# Altium PCB SD171-6.0PCB4.PcbDoc (part 6 of 11)
Units mil, origin at the board's own origin, x right, y up, seen from the top; angles counter-clockwise.
Board outline 5995 x 3921.26 mil, 6 copper layers (Top Layer, GND, Mid-Layer 1, Mid-Layer 2, VCC, Bottom Layer); 477 components, 539 nets, 2143 pads, 1050 vias.
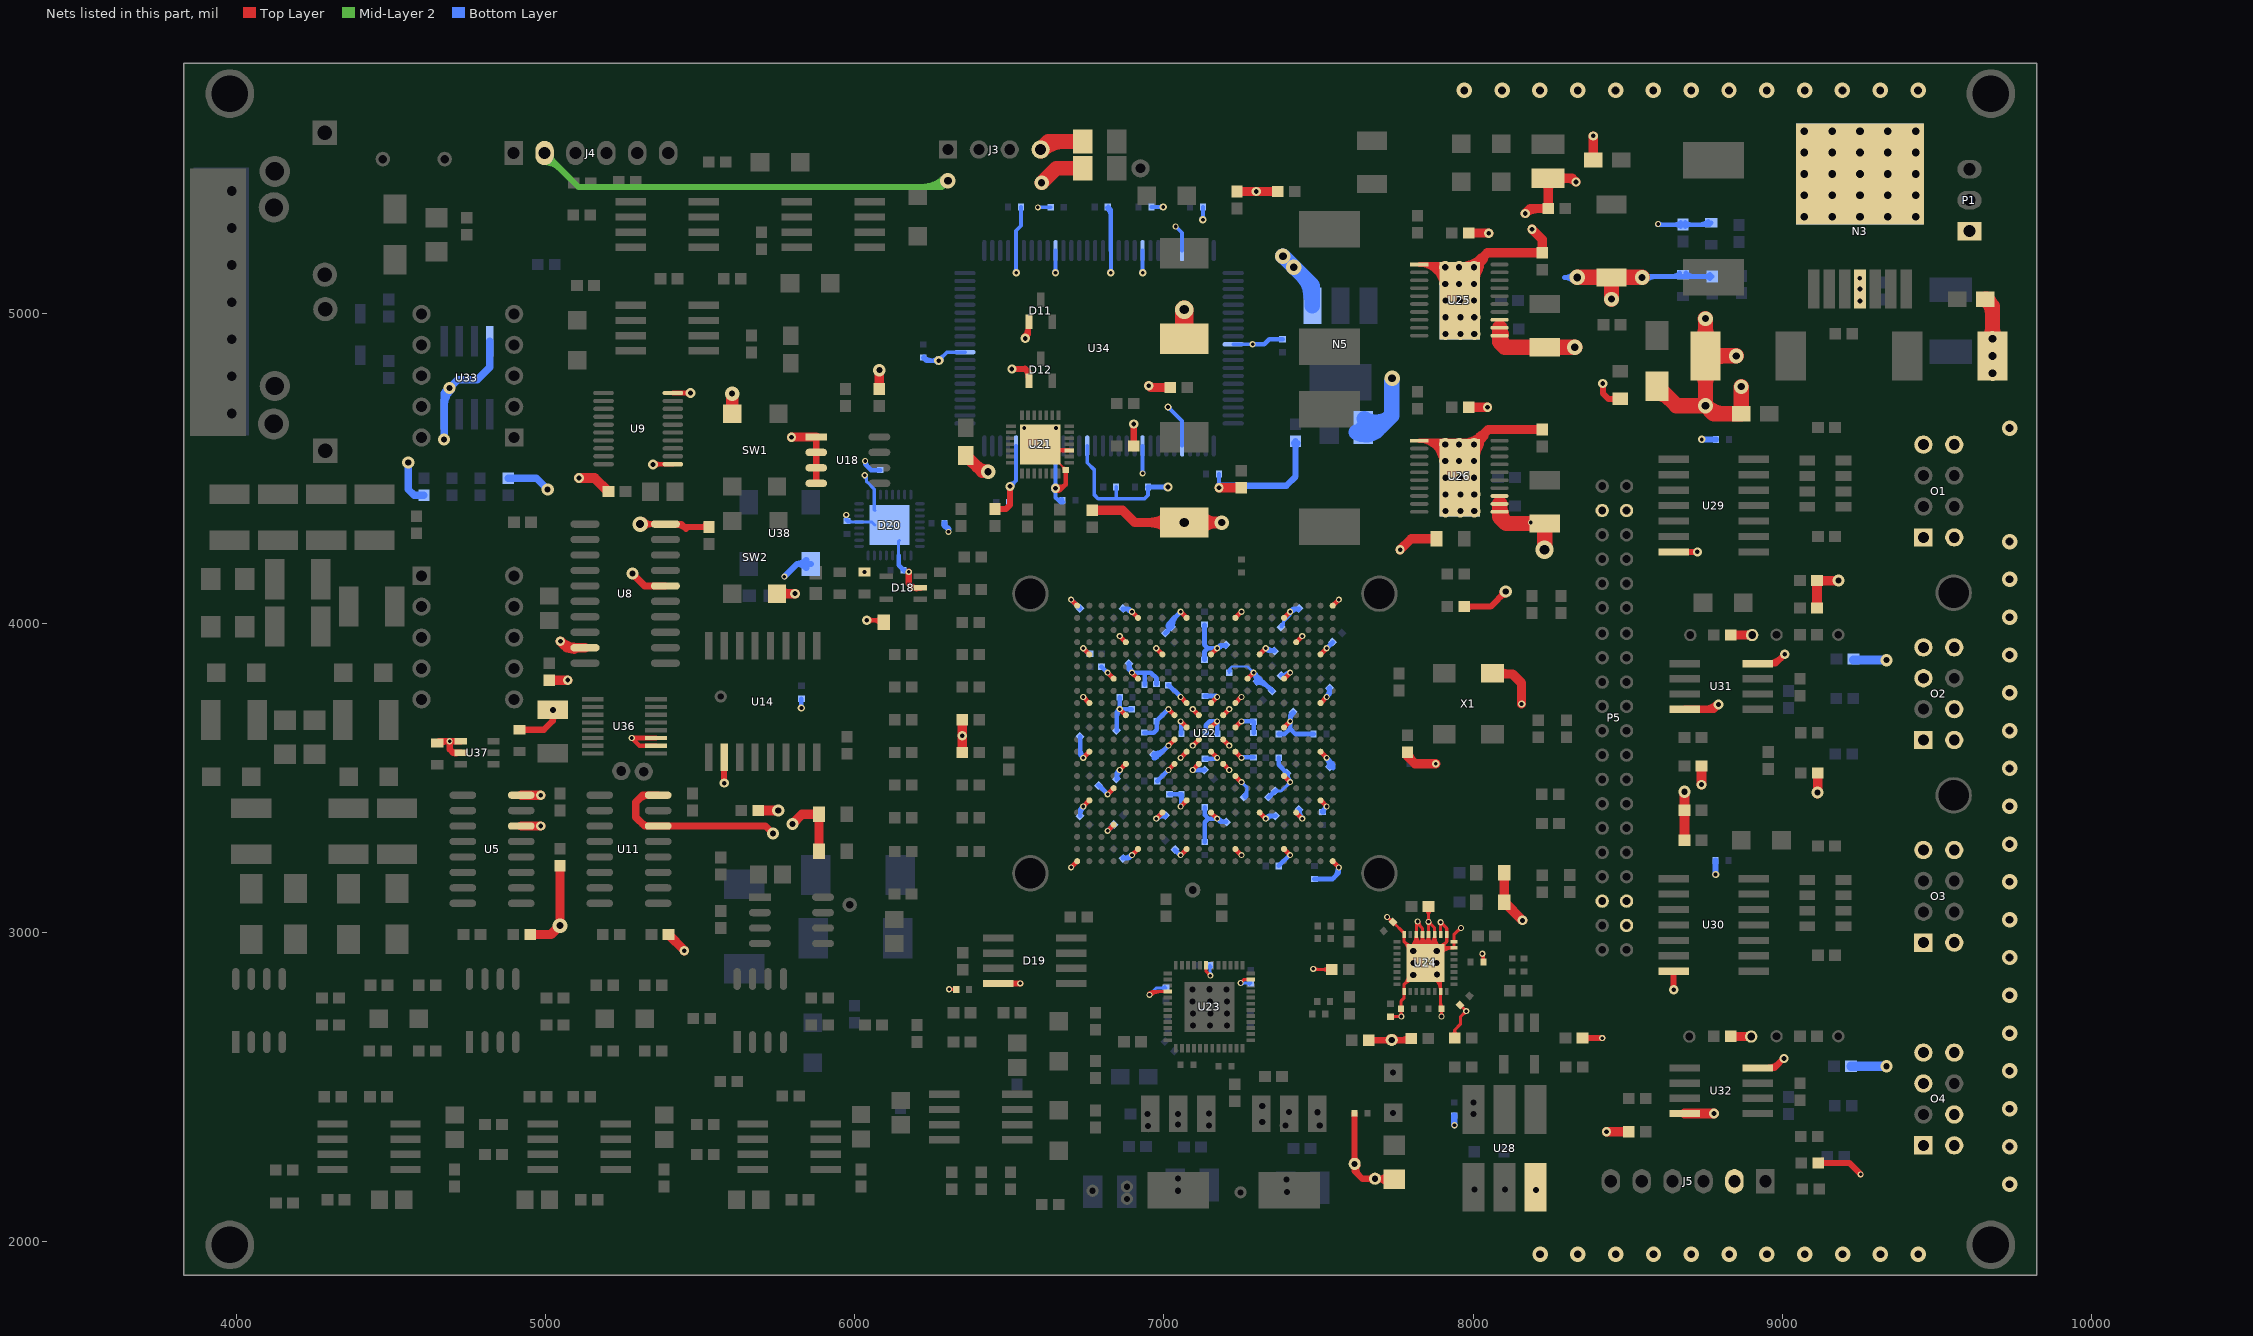
[diagram p10: the nets of this part, all layers, seen from the top]

## Via types
v1: diameter 19.68, hole 11.81, Top Layer to Bottom Layer, 521 vias
v2: diameter 50, hole 25, Top Layer to Bottom Layer, 162 vias
v3: diameter 30, hole 15, Top Layer to Bottom Layer, 100 vias
v4: diameter 39.37, hole 19.68, Top Layer to Bottom Layer, 74 vias
v5: diameter 31.5, hole 15.75, Top Layer to Bottom Layer, 44 vias
v6: diameter 40, hole 20, Top Layer to Bottom Layer, 38 vias
v7: diameter 24, hole 12, Top Layer to Bottom Layer, 33 vias
v8: diameter 47.24, hole 23.62, Top Layer to Bottom Layer, 24 vias
v9: diameter 59.06, hole 31.5, Top Layer to Bottom Layer, 10 vias
v10: diameter 60, hole 30, Top Layer to Bottom Layer, 9 vias
v11: diameter 25.98, hole 12.99, Top Layer to Bottom Layer, tented top, 9 vias
v12: diameter 23.62, hole 11.81, Top Layer to Bottom Layer, 8 vias
v13: diameter 20, hole 12, Top Layer to Bottom Layer, 6 vias
v14: diameter 50, hole 27.56, Top Layer to Bottom Layer, 4 vias
v15: diameter 51.18, hole 27.56, Top Layer to Bottom Layer, 2 vias
v16: diameter 39.37, hole 23.62, Top Layer to Bottom Layer, 2 vias
v17: diameter 80, hole 40, Top Layer to Bottom Layer, 1 vias
v18: diameter 47.24, hole 19.68, Top Layer to Bottom Layer, 1 vias
v19: diameter 47.24, hole 27.56, Top Layer to Bottom Layer, 1 vias
v20: diameter 22.05, hole 11.81, Top Layer to Bottom Layer, 1 vias

## Nets (pads, with @x,y where several pads share a name; then routed paths per layer and width w, separated by ;. In a path a pad name is that pad's centre, name@x,y a point inside that pad or via, vN(x,y) a via of type N, cw(c..) or ccw(c..) an arc to the next point about the centre after c; other vN are vias at no path point) (continued)
GND: C18.1 C20.2 C22.2 C23.2 C28.1 C35.2 C41.1 C43.2 C46.2 C49.2 C54.2 C56.2 C57.2 C58.2 C59.1 C65.1 C69.2 C74.2 C75.2 C77.2 C78.2 C79.2 C80.2 C81.2 C82.2 C83.2 C84.2 C85.2 C86.2 C87.2 C88.2 C89.2 C90.1 C91.2 C92.2 C93.2 C96.2 C97.1 C99.2 C104.2 C105.2 C106.2 C110.1 C113.1 C114.1 C115.1 C117.1 C118.1 C119.1 C120.1 C121.1 C122.1 C123.1 C124.1 C125.1 C126.1 C127.1 C128.1 C129.1 C130.1 C131.1 C132.1 C133.1 C134.1 C135.1 C136.1 C138.1 C139.1 C140.1 C141.1 C142.1 C143.1 C144.1 C145.1 C146.1 C147.1 C148.1 C152.1 C153.1 C154.1 C155.1 C156.1 C158.2 C159.1 C160.1 C161.1 C162.1 C163.2 C164.1 C165.1 C166.1 C167.1 C168.1 C169.1 C170.1 C171.1 C172.1 C173.1 C174.1 C175.1 C176.1 C177.1 C178.1 C179.1 C180.1 C181.1 C182.1 C183.1 C184.1 C185.1 C186.1 C187.1 C188.1 C189.1 C190.1 C191.1 C192.1 C193.1 C194.1 C195.1 C196.1 C197.1 C198.1 C199.1 C200.1 C201.1 C204.1 C205.1 C206.1 C207.1 C208.1 C209.1 C210.1 C211.1 C215.2 C216.1 C218.1 C219.1 C220.2 C221.2 C222.2 C223.1 C224.1 C225.1 C226.1 C227.1 C228.2 C229.2 D6.1 D8.2 D9.2 D10.2 D11.1 D12.1 D13.2 D14.2 D15.2 D16.2 D18.2 D19.4 D20.11 D20.21 D20.26 D20.33 J3.4 J4.2 J5.2 N3.4 N3.8 N5.1 O1.1 O1.4 O1.5 O1.8 O2.1 O2.3 O2.4 O2.5 O2.7 O2.8 O3.1 O3.4 O3.5 O3.8 O4.1 O4.3 O4.4 O4.5 O4.7 O4.8 P1.1 P5.4 P5.5 P5.6 P5.37 P5.38 pad.0@5023,3719 pad.0@7617,2250 pad.0@7683,2202 pad.0@7737,2651 pad.0@7806.5,2860.5 pad.0@7806.64,2939.36 pad.0@7807,2900 pad.0@7882,2900 pad.0@7882.64,2939 pad.0@7883.25,2862.75 pad.0@7957,4470 pad.0@7957,5043 pad.0@8204,2166 pad.0@8903,3961 pad.0@9251.02,5452.84 pad.2 R61.1 R65.2 R69.1 R77.2 R78.1 R80.2 R87.1 R89.2 R90.2 R93.2 R95.1 R101.1 R104.1 R119.2 R126.2 R129.2 R141.1 R142.1 SW1.2 SW2.1 U5.6 U5.8 U8.6 U8.10 U8.19 U9.1 U9.10 U11.6 U11.8 U14.10 U18.1 U18.2 U18.3 U18.4 U21.0 U21.3 U22.A1 U22.A22 U22.AA5 U22.AA9 U22.AA13 U22.AA17 U22.AB1 U22.AB22 U22.B5 U22.B9 U22.B13 U22.B17 U22.D4 U22.D18 U22.E2 U22.E7 U22.E11 U22.E15 U22.E21 U22.G5 U22.G18 U22.H7 U22.J2 U22.J9 U22.J11 U22.J13 U22.J15 U22.J21 U22.K10 U22.K12 U22.K14 U22.L5 U22.L9 U22.L11 U22.L13 U22.L18 U22.M10 U22.M12 U22.M14 U22.N2 U22.N9 U22.N11 U22.N13 U22.N17 U22.N21 U22.P10 U22.P12 U22.P14 U22.R5 U22.R18 U22.U2 U22.U7 U22.U21 U22.V4 U22.V10 U22.V14 U22.W7 U22.W16 U22.W19 U23.7 U23.16 U23.47 U24.7 U24.8 U24.9 U24.10 U24.11 U24.12 U24.13 U24.14 U24.16 U24.25 U24.31 U24.33 U25.1 U25.11 U25.12 U25.13 U26.1 U26.11 U26.12 U26.13 U28.3 U29.7 U30.7 U31.4 U31.8 U32.4 U32.8 U33.4 U33.8 U34.5 U34.10 U34.17 U34.21 U34.26 U34.40 U34.55 U34.60 U34.67 U34.71 U34.76 U34.90 U36.10 U36.11 U37.1 U37.2 U38.2 X1.2 | length 54779.2
  Top Layer w7: U21.0@6619.2,4558.37 U21.0@6682.19,4495.38 ; 6671.36,4506.21 ccw(c6682.19,4517.03) 6682.19,4501.72 cw(c6682.19,4517.03) 6671.36,4506.21 ; 6671.36,4506.21 cw(c6660.53,4495.38) 6675.85,4495.38 ccw(c6660.53,4495.38) 6671.36,4506.21
  Top Layer w10: v1(6305,2815) 6306,2815 6307.02,2813.98 C216.1@6327.7,2813.98 ; v1@6308.42,2818.42 ccw(c6319.15,2829.15) C216.1@6319.15,2813.98 ; C216.1@6324.16,2810.45 ccw(c6315.63,2801.91) 6315.63,2813.98 ccw(c6315.63,2826.05) C216.1@6324.16,2817.52 ; v1@6949.35,2800.65 cw(c6965.9,2784.1) 6965.9,2807.5 ; v1(6953,2797) 6953,2798 6962.5,2807.5 U23.16@7012.11,2807.5 ; v1@6956.42,2793.58 cw(c6990.04,2759.96) 6990.04,2807.5 ; U23.7@7136.61,2892.6 7136.61,2872.39 v1(7150,2859) ; v1(7248,2835) 7259.9,2846.9 U23.47@7280.71,2846.9 ; v1(7483,2881) 7483,2878 7484,2879 R89.2@7543,2879 ; v1@7486.42,2884.42 ccw(c7499.52,2897.52) 7499.52,2879 ; R89.2@7532.81,2869.81 ccw(c7510.62,2847.62) 7510.62,2879 ccw(c7510.62,2910.38) R89.2@7532.81,2888.19 ; v1(7722,3049) 7738.4,3032.6 C206.1@7740.85,3032.6 7777.24,2996.2 U24.16@7777.24,2991.84 7777.24,2968.76 ; v1@7727.43,3043.57 ccw(c7740.14,3056.28) C206.1@7740.14,3038.31 ; C200.1@7733.14,2726.22 7766.22,2726.22 v1@7767,2727 ; C200.1@7737.67,2722.69 cw(c7746.21,2714.15) 7746.21,2726.22 cw(c7746.21,2738.29) C200.1@7737.67,2729.76 ; C206.1@7741.55,3026.89 cw(c7741.55,3014.82) 7750.09,3023.36 cw(c7758.62,3031.89) C206.1@7746.55,3031.89 ; 7754.43,2726.22 ccw(c7754.43,2740.57) 7764.58,2730.42 ccw(c7758,2737) 7767.3,2737 ; C199.1@7763.77,2747.45 cw(c7755.23,2738.91) 7767.3,2738.91 cw(c7779.37,2738.91) C199.1@7770.84,2747.45 ; C199.1@7763.77,2756.52 ccw(c7755.23,2765.05) 7767.3,2765.05 ccw(c7779.37,2765.05) C199.1@7770.84,2756.52 ; 7767.3,2740.38 ccw(c7781.38,2740.38) v1@7771.42,2730.42 ; v1(7768,2727) v1@7767,2727 ; U24.33@7791.81,2860.5 cw(c7756.36,2860.5) 7781.43,2835.43 cw(c7806.5,2810.36) U24.33@7806.5,2845.81 ; U24.33@7791.86,2885.6 cw(c7737.38,2871.1) 7777.24,2831.24 ; U24.33@7791.86,2914.4 ccw(c7737.38,2928.9) 7777.24,2968.76 ; U24.33@7791.96,2939.36 ccw(c7756.5,2939.36) 7781.57,2964.43 ccw(c7806.64,2989.5) U24.33@7806.64,2954.04 ; U24.33@7797.28,2950.67 ccw(c7763.2,2991.84) U24.14@7816.64,2991.84 ; U24.33@7801.52,2888.17 cw(c7756.77,2876.26) 7789.52,2843.52 cw(c7822.26,2810.77) U24.33@7834.17,2855.52 ; U24.33@7801.52,2911.83 ccw(c7756.77,2923.74) 7789.52,2956.48 ccw(c7822.26,2989.23) U24.33@7834.17,2944.48 ; U24.33@7803.65,2942.97 ccw(c7780.8,2970.58) 7816.64,2970.58 ; U24.33@7806.39,2939.61 ccw(c7781.62,2964.38) 7816.64,2964.38 ; U24.33@7806.5,2875.19 ccw(c7806.5,2910.64) 7831.57,2885.57 ccw(c7856.64,2860.5) U24.33@7821.19,2860.5 ; U24.33@7806.64,2924.67 cw(c7806.64,2889.22) 7831.71,2914.29 cw(c7856.78,2939.36) U24.33@7821.33,2939.36 ; U24.33@7811.19,2890.74 cw(c7776.16,2881.42) 7801.79,2855.79 cw(c7827.42,2830.16) U24.33@7836.74,2865.19 ; U24.33@7811.19,2909.26 ccw(c7776.16,2918.58) 7801.79,2944.21 ccw(c7827.42,2969.84) U24.33@7836.74,2934.81 ; U24.33@7812.73,2945.08 ccw(c7778.23,2991.84) U24.13@7836.34,2991.84 ; U24.33@7816.64,2929.36 U24.14@7816.64,2991.84 ; U24.33@7816.64,2959.57 ccw(c7850.35,2959.57) U24.33@7847.89,2925.95 ; 7816.64,2970.33 ccw(c7851.13,2970.33) U24.33@7848.62,2935.93 ; U24.14@7816.64,2981.08 ccw(c7851.92,2981.08) U24.33@7849.35,2945.9 ; 7816.64,3011.79 cw(c7843.21,3011.79) v1@7824.42,3030.58 ; U24.33@7818.67,2937.03 ccw(c7792.85,2972.03) 7836.34,2972.03 ; v1(7821,3034) 7819,3034 v1@7816.64,3031.64 ; v1@7825.84,3033.77 ccw(c7850.3,3032.62) 7832.98,3015.3 ; U24.33@7828.11,2953.09 ccw(c7815.05,2991.84) U24.12@7855.94,2991.84 ; U24.33@7831.3,2943.61 ccw(c7819.74,2977.92) 7855.94,2977.92 ; U24.33@7831.6,2845.86 ccw(c7817.1,2791.38) 7777.24,2831.24 ; U24.33@7831.6,2954.14 cw(c7817.1,3008.62) 7777.24,2968.76 ; U24.33@7834.5,2934.14 ccw(c7824.43,2963.99) 7855.94,2963.99 ; 7836.34,2963.87 ccw(c7867.82,2963.87) U24.33@7857.64,2934.09 ; 7836.34,2977.86 ccw(c7872.59,2977.86) U24.33@7860.88,2943.55 ; U24.33@7842.11,2955.89 ccw(c7839.6,2991.84) U24.11@7875.64,2991.84 ; U24.33@7842.8,2945.91 ccw(c7840.35,2981.12) U24.11@7875.64,2981.12 ; U24.33@7843.5,2935.94 ccw(c7841.1,2970.4) 7875.64,2970.4 ; U24.33@7844.19,2925.96 ccw(c7841.84,2959.68) U24.33@7875.64,2959.68 ; R87.1@7846.81,3073.81 cw(c7824.62,3051.62) 7856,3051.62 cw(c7887.38,3051.62) R87.1@7865.19,3073.81 ; U24.33@7850.08,2955.88 cw(c7852.7,2991.84) U24.14@7816.64,2991.84 ; v1@7852.58,3029.58 cw(c7844.45,3021.45) 7855.94,3021.45 ; v1@7852.58,3036.42 ccw(c7844.31,3044.69) 7856,3044.69 ccw(c7867.69,3044.69) v1@7859.42,3036.42 ; 7855.94,2971.91 ccw(c7899.61,2971.91) U24.33@7873.51,2936.9 ; 7855.94,3021.17 cw(c7867.83,3021.17) v1@7859.42,3029.58 ; v1@7856,3028.16 cw(c7856,3016.75) 7864.07,3024.82 ; R87.1@7856,3083 v1(7856,3033) v1@7855.94,3032.94 ; U24.33@7857.67,2944.52 ccw(c7869.57,2989.87) 7902.72,2956.72 ccw(c7935.87,2923.57) U24.33@7890.52,2911.67 ; U24.33@7860.21,2954.19 ccw(c7874.69,3009.39) 7915.04,2969.04 ; v1@7860.84,3033 ccw(c7872.81,3033) 7864.35,3024.54 ; U24.33@7864.11,2953.02 cw(c7877.37,2991.84) U24.13@7836.34,2991.84 ; U24.33@7868.57,2862.75 ccw(c7833.11,2862.75) 7858.18,2887.82 ccw(c7883.25,2912.89) U24.33@7883.25,2877.43 ; U24.33@7872.26,2949.38 ccw(c7864.09,2957.55) U24.33@7875.64,2957.55 ; U24.33@7874.09,2851.27 cw(c7838.84,2807.12) U24.31@7895.34,2807.12 ; 7875.64,2963.69 ccw(c7909.69,2963.69) U24.33@7885.61,2939.61 ; 7875.64,2967.21 ccw(c7910.85,2967.21) U24.33@7885.95,2942.31 ; U24.11@7875.64,2991.35 ccw(c7934.99,2991.35) U24.33@7893.03,2949.38 ; U24.33@7879.49,2944.91 cw(c7914.47,2991.84) U24.12@7855.94,2991.84 ; U24.33@7880.33,2859.09 cw(c7855.43,2827.89) 7895.34,2827.89 ; U24.33@7882.64,2953.68 ccw(c7882.64,2994.83) 7911.74,2965.74 ; U24.33@7886.17,2935.91 cw(c7915.78,2909.97) 7915.78,2949.34 ; v1@7891.92,3028.23 cw(c7883.65,3019.97) 7895.34,3019.97 cw(c7907.03,3019.97) v1@7898.77,3028.23 ; U24.33@7893.69,2929.32 cw(c7937.84,2890.64) U24.7@7937.84,2949.34 ; C208.1@7894.16,2747.48 cw(c7885.63,2738.95) 7897.7,2738.95 cw(c7909.77,2738.95) C208.1@7901.23,2747.48 ; v1@7894.58,2730.42 ccw(c7887.04,2737.96) 7897.7,2737.96 ; 7895.34,2770.78 ccw(c7915.46,2770.78) C208.1@7901.23,2756.55 ; U24.10@7895.34,2991.84 v1(7895.34,3031.66) 7915.04,3011.96 U24.9@7915.04,2991.84 7915.04,2969.04 ; v1@7895.34,3026.82 cw(c7895.34,3015.12) 7903.61,3023.39 cw(c7911.88,3031.66) v1@7900.18,3031.66 ; U24.33@7897.33,2939 cw(c7927.09,2939) U24.33@7906.04,2960.04 ; 7897.7,2739.42 ccw(c7910.42,2739.42) v1@7901.42,2730.42 ; v1(7898,2727) 7897.7,2727.3 C208.1@7897.7,2752.02 7895.34,2754.37 U24.31@7895.34,2808.44 7895.34,2850.66 U24.33@7846,2900 ; U24.33@7900.19,2914.21 cw(c7955.39,2928.69) 7915.04,2969.04 ; R101.1@7933.08,2667.31 ccw(c7920.75,2683.37) 7941,2683.37 ; R101.1@7941,2657 7941,2683.37 ; R101.1@7948.92,2667.31 cw(c7961.25,2683.37) 7941,2683.37 ; 7949.32,3003.32 cw(c7961,2991.64) v1@7961,3008.16 ; C205.1@7958.22,2764.2 v1@7978,2744.43 ; C205.1@7958.93,2758.49 cw(c7958.93,2746.42) 7967.47,2754.96 cw(c7976,2763.49) C205.1@7963.93,2763.49 ; v1(7961,3013) 7959,3013 7937.84,2991.84 U24.8@7937.84,2969.04 U24.7@7937.84,2949.34 ; 7969.01,2735.43 cw(c7978,2726.44) v1@7978,2739.16 ; 7969.43,2752.99 cw(c7960.44,2744) 7973.16,2744 cw(c7962.49,2744) 7970.03,2736.46 ; 7970.46,2751.97 ccw(c7978,2759.51) v1@7978,2748.84 ; v1(7978,2744) v1@7978,2744.43 ; v1@8026.58,2926.58 cw(c8009.38,2909.38) C198.1@8033.7,2909.38 ; v1(8030,2930) 8033.7,2926.3 C198.1@8033.7,2903.02 ; C198.1@8030.16,2907.55 ccw(c8021.63,2916.09) 8033.7,2916.09 ccw(c8045.77,2916.09) C198.1@8037.23,2907.55 ; v1@7767,2727 7767.3,2727.3 C199.1@7767.3,2751.98 7767.3,2777.3 7777.24,2787.24 U24.25@7777.24,2808.44 7777.24,2831.24 ; 7777.24,2831.24 U24.33@7846,2900 ; 7777.24,2968.76 U24.33@7846,2900 ; U24.14@7816.64,2991.84 v1@7816.64,3031.64 ; v1@7816.64,3031.64 7836.34,3011.94 U24.13@7836.34,2991.84 ; U24.13@7836.34,2991.84 7836.34,2909.66 U24.33@7846,2900 ; U24.33@7846,2900 7855.94,2909.94 U24.12@7855.94,2991.84 ; U24.33@7846,2900 7875.64,2929.64 U24.11@7875.64,2991.84 ; U24.33@7846,2900 U24.33@7895.34,2949.34 ; U24.12@7855.94,2991.84 v1@7855.94,3032.94 ; v1@7855.94,3032.94 7875.64,3013.24 U24.11@7875.64,2991.84 ; U24.33@7895.34,2949.34 7915.04,2969.04 ; U24.33@7895.34,2949.34 U24.7@7937.84,2949.34 ; 7941,2683.37 7959,2701.37 7959,2725.43 v1@7978,2744.43 ; U24.33@7855.91,2909.91 ccw(c7826.81,2939) 7867.96,2939 cw(c7826.81,2939) U24.33@7855.91,2909.91 ; U24.33@7861.6,2915.6 cw(c7882.64,2894.55) 7882.64,2924.32 ccw(c7882.64,2894.55) U24.33@7861.6,2915.6
  Top Layer w11.81: v5@6551,4920 v5(6551,4921) 6563.6,4933.6 ; v5@6553.19,4930.6 ccw(c6555.68,4941.52) 6563.6,4933.6 ; 6555.05,4943.22 cw(c6578.9,4936.83) D11.1@6566.55,4958.21 ; v5@6560.6,4923.19 cw(c6571.52,4925.68) 6563.6,4933.6 ; 6563.6,4933.6 D11.1@6563.6,4975.13 ; 6563.6,4949.07 ccw(c6549.34,4949.07) 6559.42,4959.15 cw(c6549.34,4949.07) 6563.6,4949.07 ; 6563.6,4949.07 cw(c6577.86,4949.07) 6567.77,4959.15 ccw(c6577.86,4949.07) 6563.6,4949.07 ; D11.1@6563.6,4975.13 cw(c6496.94,4975.13) 6544.04,4927.96 ccw(c6496.94,4975.13) D11.1@6563.6,4975.13 ; v5@6552.39,4919.61 ccw(c6525.39,4946.64) 6563.6,4946.64 cw(c6525.39,4946.64) v5@6552.39,4919.61
  Top Layer w15: U36.10@5356.72,3603 5303,3603 v1(5278,3628) U36.11@5356.72,3628 ; v3(6038,4009) 6086,4009 D10.2@6093,4002 ; v3@6043.3,4003.7 cw(c6056.11,3990.89) 6056.11,4009 cw(c6056.11,4027.11) v3@6043.3,4014.3 ; 6057.99,4009 cw(c6057.99,3971.99) D10.2@6084.16,3998.16 ; 6067.65,4009 ccw(c6067.65,4032.35) D10.2@6084.16,4015.84 ; U21.0@6599.51,4578.06 6619.2,4558.37 U21.3@6694,4558.37 ; v3(6649,4436) 6670,4436 6682.19,4448.19 ; U21.0@6682.19,4495.38 6682.19,4448.19 ; v1(6699.54,3209.54) U22.AB22@6719.23,3229.23 ; v1(6699.54,4075.69) U22.AB1@6719.23,4056 ; v1(6738.91,3406.39) U22.AA17@6758.6,3426.08 ; v1(6738.91,3563.87) U22.AA13@6758.6,3583.56 ; v1(6738.91,3760.73) U22.AA9@6758.6,3741.04 ; v1(6738.91,3918.21) U22.AA5@6758.6,3898.52 ; v1(6817.65,3327.65) U22.W19@6837.34,3347.34 ; v1(6817.65,3445.76) U22.W16@6837.34,3465.45 ; v1(6817.65,3839.47) U22.W7@6837.34,3819.78 ; v1(6857.02,3524.5) U22.V14@6876.71,3544.19 ; v1(6857.02,3721.36) U22.V10@6876.71,3701.67 ; v1(6857.02,3957.58) U22.V4@6876.71,3937.89 ; v1(6896.39,3248.91) U22.U21@6916.08,3268.6 ; v1(6896.39,3839.47) U22.U7@6916.08,3819.78 ; v1(6896.39,4036.32) U22.U2@6916.08,4016.63 ; v1(6975.13,3367.02) U22.R18@6994.82,3386.71 ; v1(6975.13,3918.21) U22.R5@6994.82,3898.52 ; v1(7014.5,3524.5) U22.P14@7034.19,3544.19 ; v1(7014.5,3603.24) U22.P12@7034.19,3622.93 ; v1(7014.5,3721.36) U22.P10@7034.19,3701.67 ; v1(7053.87,3248.91) U22.N21@7073.56,3268.6 ; v1(7053.87,3406.39) U22.N17@7073.56,3426.08 ; v1(7053.87,3563.87) U22.N13@7073.56,3583.56 ; v1(7053.87,3681.99) U22.N11@7073.56,3662.3 ; v1(7053.87,3760.73) U22.N9@7073.56,3741.04 ; v1(7053.87,4036.32) U22.N2@7073.56,4016.63 ; v1(7093.24,3524.5) U22.M14@7112.93,3544.19 ; v1(7093.24,3603.24) U22.M12@7112.93,3622.93 ; v1(7093.24,3721.36) U22.M10@7112.93,3701.67 ; U22.L18@7152.3,3386.71 v1(7171.99,3367.02) ; U22.L13@7152.3,3583.56 v1(7171.99,3563.87) ; U22.L11@7152.3,3662.3 v1(7171.99,3681.99) ; U22.L9@7152.3,3741.04 v1(7171.99,3760.73) ; U22.L5@7152.3,3898.52 v1(7171.99,3918.21) ; U22.K14@7191.67,3544.19 v1(7211.36,3524.5) ; U22.K12@7191.67,3622.93 v1(7211.36,3603.24) ; U22.K10@7191.67,3701.67 v1(7211.36,3721.36) ; U22.J21@7231.04,3268.6 v1(7250.73,3248.91) ; U22.J15@7231.04,3504.82 v1(7250.73,3485.13) ; U22.J13@7231.04,3583.56 v1(7250.73,3563.87) ; U22.J11@7231.04,3662.3 v1(7250.73,3681.99) ; U22.J9@7231.04,3741.04 v1(7250.73,3760.73) ; U22.J2@7231.04,4016.63 v1(7250.73,4036.32) ; U22.H7@7270.41,3819.78 v1(7290.1,3839.47) ; U22.G18@7309.78,3386.71 v1(7329.47,3367.02) ; U22.G5@7309.78,3898.52 v1(7329.47,3918.21) ; U22.E21@7388.52,3268.6 v1(7408.21,3248.91) ; U22.E15@7388.52,3504.82 v1(7408.21,3485.13) ; U22.E11@7388.52,3662.3 v1(7408.21,3681.99) ; U22.E7@7388.52,3819.78 v1(7408.21,3839.47) ; U22.E2@7388.52,4016.63 v1(7408.21,4036.32) ; U22.D18@7427.89,3386.71 v1(7447.58,3367.02) ; U22.D4@7427.89,3937.89 v1(7447.58,3957.58) ; U22.B17@7506.63,3426.08 v1(7526.32,3406.39) ; U22.B13@7506.63,3583.56 v1(7526.32,3563.87) ; U22.B9@7506.63,3741.04 v1(7526.32,3760.73) ; U22.B5@7506.63,3898.52 v1(7526.32,3918.21) ; U22.A1@7546,4056 v1(7565.69,4075.69) ; U22.A22@7547.77,3229.23 U22.A22@7546,3229.23 7566,3209.23 v1(7566,3209) ; 7861.65,5153.34 ccw(c7876.69,5185.27) pad.0@7901.29,5159.96 ; 7865.45,4590.16 ccw(c7885.13,4608.88) pad.0@7902.16,4587.73 ; 7869.83,5156.58 ccw(c7881.92,5190.15) pad.0@7902.71,5161.16 ; 7875.3,4584.09 ccw(c7886.34,4603.2) pad.0@7901.44,4587.11 ; 7876.68,4578.36 ccw(c7895.38,4596.15) pad.0@7911.57,4576.05 ; 7879.92,4585.9 cw(c7872.3,4555.35) pad.0@7899.28,4571.56 ; 7880.77,5159.1 cw(c7872.72,5129.8) pad.0@7899.13,5144.82 ; 7881.06,5159.02 ccw(c7889,5187.91) pad.0@7903.82,5161.87 ; 7881.24,5144.11 ccw(c7892.81,5168.68) pad.0@7911.74,5149.21 ; 7881.71,4585.45 ccw(c7888.7,4613.47) pad.0@7903.56,4588.72 ; 7886.34,4559.24 cw(c7851.48,4528.88) pad.0@7897.54,4525.04 ; 7887.91,4566.56 ccw(c7905.63,4583.42) pad.0@7920.98,4564.37 ; 7889.32,4571.07 ccw(c7946.72,4585.6) pad.0@7916.4,4534.74 ; 7890.61,4565.97 ccw(c7959.36,4583.36) pad.0@7956.23,4512.52 ; 7890.8,4546.44 ccw(c7910.05,4560.12) pad.0@7910.02,4536.5 ; v6@7891.92,5147.5 cw(c7869.19,5108.13) pad.0@7914.57,5105.48 ; pad.0@7894.07,4541.84 cw(c7876.86,4529.6) pad.0@7897.67,4526.08 ; pad.0@7896.55,4572.74 ccw(c7954.28,4578.94) pad.0@7917.84,4533.73 ; pad.0@7896.82,5144.67 ccw(c7921.14,5186.79) pad.0@7940.28,5142.07 ; pad.0@7899.6,5106.35 ccw(c7842.03,5109.72) 7870.86,5159.65 ccw(c7906.41,5221.22) pad.0@7934.38,5155.86 ; pad.0@7899.72,5104.11 ccw(c7879.44,5118.15) pad.0@7902.19,5127.66 ; pad.0@7900.59,5114.15 ccw(c7854.66,5123.23) 7887.98,5156.12 ccw(c7909.95,5177.81) pad.0@7926.39,5151.67 ; pad.0@7900.64,4541.41 ccw(c7856.6,4550.32) 7887.82,4582.64 ccw(c7909.63,4605.22) pad.0@7926.36,4578.65 ; pad.0@7901.04,5126.38 cw(c7920.02,5135.42) pad.0@7908.65,5153.1 ; pad.0@7901.1,5142.83 ccw(c7920.14,5161.62) pad.0@7934.37,5138.98 ; pad.0@7901.57,4569.35 ccw(c7920.12,4588.55) pad.0@7934.35,4565.96 ; pad.0@7902.98,4534.34 ccw(c7895.31,4545.62) 7908.85,4547.23 ccw(c7926.37,4549.31) pad.0@7916.79,4534.5 ; pad.0@7905.29,4535.58 ccw(c7901.92,4543.86) pad.0@7910.59,4546.05 ; pad.0@7907.5,5138.75 cw(c7900.47,5104.25) pad.0@7929.84,5123.67 ; pad.0@7908.1,4565.65 cw(c7898.59,4503.95) pad.0@7948.95,4540.83 ; pad.0@7908.16,5154.11 ccw(c7922.58,5187.17) pad.0@7946.66,5160.31 ; pad.0@7908.36,5111 cw(c7929.3,5120.98) pad.0@7916.76,5140.49 ; pad.0@7908.41,5138.6 cw(c7901.22,5082.57) pad.0@7945.93,5117.1 ; pad.0@7909.12,4566.32 ccw(c7903.6,4619.77) pad.0@7945.3,4585.88 ; pad.0@7909.27,4543.69 cw(c7927.58,4551) pad.0@7916.82,4567.53 ; pad.0@7911.84,4579.69 cw(c7885.9,4555.92) pad.0@7921.05,4554.38 ; pad.0@7913.41,4561.15 ccw(c7900.81,4609.95) pad.0@7944.23,4584.35 ; pad.0@7916.19,4570.34 ccw(c7911.95,4613.32) pad.0@7945.34,4585.93 ; pad.0@7916.49,5140.32 cw(c7921.81,5131.57) pad.0@7929.92,5137.83 ; pad.0@7917.2,4513.78 cw(c7932.38,4492.21) pad.0@7936.9,4518.2 ; pad.0@7917.28,4588.16 ccw(c7932.21,4609.02) 7937.29,4583.88 ccw(c7942.11,4560.11) pad.0@7920.92,4571.91 ; pad.0@7918.56,4587.11 ccw(c7933.66,4603.2) pad.0@7944.7,4584.09 ; pad.0@7918.79,5157.5 ccw(c7929.65,5187.8) pad.0@7947.91,5161.29 ; pad.0@7920.22,4531.2 ccw(c7948,4550.75) pad.0@7942.19,4517.28 ; pad.0@7920.3,4584.09 ccw(c7931.34,4603.2) pad.0@7946.44,4587.11 ; pad.0@7922.02,5147.56 ccw(c7976.73,5131.92) pad.0@7926.98,5104.3 ; pad.0@7922.16,4562.36 cw(c7887.83,4519.64) pad.0@7942.53,4523.19 ; pad.0@7922.25,5148.5 ccw(c7946.89,5143.48) pad.0@7925.91,5129.61 ; pad.0@7925.72,4564.32 ccw(c7919.69,4587.66) pad.0@7942.94,4581.3 ; pad.0@7928.69,5139.42 ccw(c7981.46,5161.48) pad.0@7959.75,5108.56 ; pad.0@7929.56,5144.77 ccw(c7939.72,5168.05) pad.0@7956.67,5149.14 ; pad.0@7930.42,4583.09 cw(c7931.63,4571.36) pad.0@7942.98,4574.58 ; pad.0@7931.33,4564.9 ccw(c7922.69,4558.57) pad.0@7916.84,4567.53 ; pad.0@7934.49,4572.15 cw(c7936.18,4555.06) pad.0@7947.07,4568.34 ; pad.0@7934.72,4555.79 cw(c7918.58,4535.71) pad.0@7943.1,4527.83 ; pad.0@7935.37,4510.85 ccw(c7932.19,4542.67) pad.0@7956.93,4522.42 ; pad.0@7945.39,5104.99 ccw(c7927.67,5119.71) pad.0@7948.92,5128.59 ; pad.0@7946.72,5130.34 cw(c7962.74,5137.9) pad.0@7953.73,5153.15 ; pad.0@7953.75,5115.46 cw(c7971.14,5123.68) pad.0@7961.36,5140.24 ; pad.0@7956.84,4579.69 cw(c7930.91,4555.91) pad.0@7966.06,4554.39 ; pad.0@7963.69,4586.98 ccw(c7978.13,4601.91) pad.0@7988.76,4584.07 ; pad.0@7967.02,5147.58 ccw(c8013.56,5134.35) pad.0@7971.3,5110.8 ; pad.0@7968.3,4584.09 ccw(c7979.34,4603.2) pad.0@7994.44,4587.11 ; pad.0@7980.95,4557.2 cw(c7962.7,4534.49) pad.0@7990.9,4527.15 ; pad.0@8008,5160 U25.1@7826,5160 ; v3@6645.86,4429.19 ccw(c6653.7,4446.22) 6666.96,4432.96 ; v3@6645.86,4429.19 ccw(c6653.7,4446.22) 6666.96,4432.96 ; v3@6645.86,4429.19 ccw(c6653.7,4446.22) 6666.96,4432.96 ; v3@6652.14,4442.81 ccw(c6663.3,4467.07) 6682.19,4448.19 ; v3@6652.14,4442.81 ccw(c6663.3,4467.07) 6682.19,4448.19 ; v3@6652.14,4442.81 ccw(c6663.3,4467.07) 6682.19,4448.19 ; v3@6654.3,4430.7 cw(c6667.11,4417.89) 6667.11,4436 ; v3@6654.3,4430.7 cw(c6667.11,4417.89) 6667.11,4436 ; v3@6654.3,4430.7 cw(c6667.11,4417.89) 6667.11,4436 ; v3@6654.3,4441.3 ccw(c6667.11,4454.11) 6667.11,4436 ; v3@6654.3,4441.3 ccw(c6667.11,4454.11) 6667.11,4436 ; v3@6654.3,4441.3 ccw(c6667.11,4454.11) 6667.11,4436 ; U26.1@7826,4590 cw(c7826,4515.73) pad.0@7899.84,4523.77 ; U26.1@7826,4590 cw(c7826,4515.73) pad.0@7899.84,4523.77 ; U26.1@7826,4590 cw(c7826,4515.73) pad.0@7899.84,4523.77 ; U26.1@7826,4590 cw(c7826,4515.73) pad.0@7899.84,4523.77 ; U26.1@7826,4590 pad.0@8013,4590 ; U25.1@7826,5160 cw(c7826,5085.32) pad.0@7900.02,5095.31 ; U25.1@7826,5160 cw(c7826,5085.32) pad.0@7900.02,5095.31 ; U25.1@7826,5160 cw(c7826,5085.32) pad.0@7900.02,5095.31 ; U26.1@7842.73,4590 cw(c7842.73,4517.55) pad.0@7914.75,4525.4 ; U26.1@7842.73,4590 cw(c7842.73,4517.55) pad.0@7914.75,4525.4 ; U26.1@7842.73,4590 cw(c7842.73,4517.55) pad.0@7914.75,4525.4 ; U26.1@7842.73,4590 cw(c7842.73,4517.55) pad.0@7914.75,4525.4 ; U25.1@7843.17,5160 cw(c7843.17,5087.63) pad.0@7914.88,5097.31 ; U25.1@7843.17,5160 cw(c7843.17,5087.63) pad.0@7914.88,5097.31 ; U25.1@7843.17,5160 cw(c7843.17,5087.63) pad.0@7914.88,5097.31 ; U26.1@7850.85,4590 cw(c7850.85,4518.85) pad.0@7901.16,4569.16 ; U26.1@7850.85,4590 cw(c7850.85,4518.85) pad.0@7901.16,4569.16 ; U26.1@7850.85,4590 cw(c7850.85,4518.85) pad.0@7901.16,4569.16 ; 7859.47,4584.09 ccw(c7877.79,4621.27) pad.0@7902.54,4588.03 ; 7859.47,4584.09 ccw(c7877.79,4621.27) pad.0@7902.54,4588.03 ; 7859.47,4584.09 ccw(c7877.79,4621.27) pad.0@7902.54,4588.03 ; 7859.45,4590 cw(c7859.45,4519.37) pad.0@7929.66,4527.02 ; 7859.45,4590 cw(c7859.45,4519.37) pad.0@7929.66,4527.02 ; 7859.45,4590 cw(c7859.45,4519.37) pad.0@7929.66,4527.02 ; 7859.45,4590 cw(c7859.45,4519.37) pad.0@7929.66,4527.02 ; 7860.33,5160 cw(c7860.33,5089.95) pad.0@7929.75,5099.32 ; 7860.33,5160 cw(c7860.33,5089.95) pad.0@7929.75,5099.32 ; 7860.33,5160 cw(c7860.33,5089.95) pad.0@7929.75,5099.32 ; 7866.27,4589.3 cw(c7833.03,4531.73) pad.0@7899.51,4530.8 ; 7866.27,4589.3 ccw(c7907.25,4660.28) pad.0@7936.49,4583.72 ; 7866.27,4589.3 ccw(c7907.25,4660.28) pad.0@7936.49,4583.72 ; 7866.27,4589.3 cw(c7833.03,4531.73) pad.0@7899.51,4530.8 ; 7866.27,4589.3 ccw(c7907.25,4660.28) pad.0@7936.49,4583.72 ; 7866.27,4589.3 cw(c7833.03,4531.73) pad.0@7899.51,4530.8 ; 7866.47,4587.36 ccw(c7883.33,4632.18) pad.0@7904.48,4589.22 ; 7866.47,4587.36 ccw(c7883.33,4632.18) pad.0@7904.48,4589.22 ; 7866.47,4587.36 ccw(c7883.33,4632.18) pad.0@7904.48,4589.22 ; 7876.12,4590.01 cw(c7865.74,4553.23) pad.0@7899.09,4571.9 ; 7876.12,4590.01 cw(c7865.74,4553.23) pad.0@7899.09,4571.9 ; 7876.12,4590.01 cw(c7865.74,4553.23) pad.0@7899.09,4571.9 ; 7876.17,4590 cw(c7876.17,4521.19) pad.0@7944.57,4528.65 ; 7876.17,4590 cw(c7876.17,4521.19) pad.0@7944.57,4528.65 ; 7876.17,4590 cw(c7876.17,4521.19) pad.0@7944.57,4528.65 ; 7876.17,4590 cw(c7876.17,4521.19) pad.0@7944.57,4528.65 ; 7877.49,5160 cw(c7877.49,5092.27) pad.0@7944.61,5101.33 ; 7877.49,5160 cw(c7877.49,5092.27) pad.0@7944.61,5101.33 ; 7877.49,5160 cw(c7877.49,5092.27) pad.0@7944.61,5101.33 ; 7881.48,4573.25 ccw(c7894.24,4599.16) pad.0@7911.49,4575.99 ; 7881.48,4573.25 ccw(c7894.24,4599.16) pad.0@7911.49,4575.99 ; 7881.48,4573.25 ccw(c7894.24,4599.16) pad.0@7911.49,4575.99 ; 7885.06,4586.3 cw(c7845.16,4547.45) pad.0@7900.19,4538.86 ; 7885.06,4586.31 ccw(c7910.94,4611.5) pad.0@7928.71,4580.06 ; 7885.06,4586.31 ccw(c7910.94,4611.5) pad.0@7928.71,4580.06 ; 7885.06,4586.3 cw(c7845.16,4547.45) pad.0@7900.19,4538.86 ; 7885.06,4586.31 ccw(c7910.94,4611.5) pad.0@7928.71,4580.06 ; 7885.06,4586.3 cw(c7845.16,4547.45) pad.0@7900.19,4538.86 ; 7885.06,4586.31 ccw(c7910.94,4611.5) pad.0@7928.71,4580.06 ; 7885.06,4586.3 cw(c7845.16,4547.45) pad.0@7900.19,4538.86 ; 7885.85,4559.8 ccw(c7938.08,4580.07) pad.0@7957.88,4527.66 ; 7885.85,4559.8 ccw(c7938.08,4580.07) pad.0@7957.88,4527.66 ; 7885.85,4559.8 ccw(c7938.08,4580.07) pad.0@7957.88,4527.66 ; 7887.07,4586.92 ccw(c7893.09,4608.22) pad.0@7903.9,4588.91 ; 7887.07,4586.92 ccw(c7893.09,4608.22) pad.0@7903.9,4588.91 ; 7887.07,4586.92 ccw(c7893.09,4608.22) pad.0@7903.9,4588.91 ; 7887.06,4590 cw(c7887.06,4555.06) pad.0@7911.77,4579.77 ; 7887.06,4590 cw(c7887.06,4555.06) pad.0@7911.77,4579.77 ; 7887.06,4590 cw(c7887.06,4555.06) pad.0@7911.77,4579.77 ; 7888.41,4576.52 cw(c7862.32,4531.32) pad.0@7914.5,4530.59 ; 7888.41,4576.52 cw(c7862.32,4531.32) pad.0@7914.5,4530.59 ; 7888.41,4576.52 cw(c7862.32,4531.32) pad.0@7914.5,4530.59 ; 7891.33,4545.68 ccw(c7943.43,4565.91) pad.0@7963.18,4513.63 ; 7891.33,4545.68 ccw(c7943.43,4565.91) pad.0@7963.18,4513.63 ; 7891.33,4545.68 ccw(c7943.43,4565.91) pad.0@7963.18,4513.63 ; pad.0@7892.9,4590 cw(c7892.9,4523.02) pad.0@7959.49,4530.27 ; pad.0@7892.9,4590 cw(c7892.9,4523.02) pad.0@7959.49,4530.27 ; pad.0@7892.9,4590 cw(c7892.9,4523.02) pad.0@7959.49,4530.27 ; pad.0@7892.9,4590 cw(c7892.9,4523.02) pad.0@7959.49,4530.27 ; pad.0@7893.57,4573.54 ccw(c7921.74,4622.33) pad.0@7941.84,4569.7 ; pad.0@7893.57,4573.54 ccw(c7921.74,4622.33) pad.0@7941.84,4569.7 ; pad.0@7893.57,4573.54 ccw(c7921.74,4622.33) pad.0@7941.84,4569.7 ; pad.0@7894.65,5160 cw(c7894.65,5094.58) pad.0@7959.48,5103.33 ; pad.0@7894.65,5160 cw(c7894.65,5094.58) pad.0@7959.48,5103.33 ; pad.0@7894.65,5160 cw(c7894.65,5094.58) pad.0@7959.48,5103.33 ; pad.0@7895.85,4590 cw(c7895.85,4518.85) pad.0@7946.16,4569.16 ; pad.0@7895.85,4590 cw(c7895.85,4518.85) pad.0@7946.16,4569.16 ; pad.0@7895.85,4590 cw(c7895.85,4518.85) pad.0@7946.16,4569.16 ; pad.0@7898.64,4572.36 ccw(c7920.84,4593.98) pad.0@7936.09,4567 ; pad.0@7898.64,4572.36 ccw(c7920.84,4593.98) pad.0@7936.09,4567 ; pad.0@7898.64,4572.36 ccw(c7920.84,4593.98) pad.0@7936.09,4567 ; pad.0@7898.64,4572.36 ccw(c7920.84,4593.98) pad.0@7936.09,4567 ; pad.0@7899.94,4531.42 ccw(c7879.81,4546.27) pad.0@7903.13,4555.33 ; pad.0@7899.94,4531.42 ccw(c7879.81,4546.27) pad.0@7903.13,4555.33 ; pad.0@7899.94,4531.42 ccw(c7879.81,4546.27) pad.0@7903.13,4555.33 ; pad.0@7901.37,4555.57 cw(c7919.41,4563.57) pad.0@7908.63,4580.09 ; pad.0@7901.37,4555.57 cw(c7919.41,4563.57) pad.0@7908.63,4580.09 ; pad.0@7901.37,4555.57 cw(c7919.41,4563.57) pad.0@7908.63,4580.09 ; pad.0@7901.79,4533.42 ccw(c7891.13,4545.65) pad.0@7907.15,4548.16 ; pad.0@7901.79,4533.42 ccw(c7891.13,4545.65) pad.0@7907.15,4548.16 ; pad.0@7901.79,4533.42 ccw(c7891.13,4545.65) pad.0@7907.15,4548.16 ; pad.0@7901.79,4533.42 ccw(c7891.13,4545.65) pad.0@7907.15,4548.16 ; pad.0@7904.64,4584.68 ccw(c7923.03,4625.29) pad.0@7948,4588.36 ; pad.0@7904.64,4584.68 ccw(c7923.03,4625.29) pad.0@7948,4588.36 ; pad.0@7904.64,4584.68 ccw(c7923.03,4625.29) pad.0@7948,4588.36 ; pad.0@7907.15,4548.16 ccw(c7925.74,4551.07) pad.0@7916.28,4534.81 ; pad.0@7907.15,4548.16 ccw(c7925.74,4551.07) pad.0@7916.28,4534.81 ; pad.0@7907.15,4548.16 ccw(c7925.74,4551.07) pad.0@7916.28,4534.81 ; pad.0@7907.15,4548.16 ccw(c7925.74,4551.07) pad.0@7916.28,4534.81 ; pad.0@7907.26,4565.8 cw(c7898.55,4527.01) pad.0@7932.14,4548.28 ; pad.0@7907.26,4565.8 cw(c7898.55,4527.01) pad.0@7932.14,4548.28 ; pad.0@7907.26,4565.8 cw(c7898.55,4527.01) pad.0@7932.14,4548.28 ; pad.0@7908.23,4579.77 cw(c7932.94,4555.06) pad.0@7932.94,4590 ; pad.0@7908.23,4579.77 cw(c7932.94,4555.06) pad.0@7932.94,4590 ; pad.0@7908.23,4579.77 cw(c7932.94,4555.06) pad.0@7932.94,4590 ; pad.0@7908.51,4539.46 cw(c7929.16,4548.61) pad.0@7916.83,4567.53 ; pad.0@7908.51,4539.46 cw(c7929.16,4548.61) pad.0@7916.83,4567.53 ; pad.0@7908.51,4539.46 cw(c7929.16,4548.61) pad.0@7916.83,4567.53 ; pad.0@7909.62,4590 cw(c7909.62,4524.84) pad.0@7974.4,4531.9 ; pad.0@7909.62,4590 cw(c7909.62,4524.84) pad.0@7974.4,4531.9 ; pad.0@7909.62,4590 cw(c7909.62,4524.84) pad.0@7974.4,4531.9 ; pad.0@7909.62,4590 cw(c7909.62,4524.84) pad.0@7974.4,4531.9 ; pad.0@7911.81,5160 cw(c7911.81,5096.9) pad.0@7974.34,5105.34 ; pad.0@7911.81,5160 cw(c7911.81,5096.9) pad.0@7974.34,5105.34 ; pad.0@7911.81,5160 cw(c7911.81,5096.9) pad.0@7974.34,5105.34 ; pad.0@7914.67,4588.1 ccw(c7930.72,4630.83) pad.0@7949.78,4589.36 ; pad.0@7914.67,4588.1 ccw(c7930.72,4630.83) pad.0@7949.78,4589.36 ; pad.0@7914.67,4588.1 ccw(c7930.72,4630.83) pad.0@7949.78,4589.36 ; pad.0@7917.28,4567.84 cw(c7932.43,4546.71) pad.0@7936.66,4572.36 ; pad.0@7917.28,4567.84 cw(c7932.43,4546.71) pad.0@7936.66,4572.36 ; pad.0@7917.28,4567.84 cw(c7932.43,4546.71) pad.0@7936.66,4572.36 ; pad.0@7917.28,4567.84 cw(c7932.43,4546.71) pad.0@7936.66,4572.36 ; pad.0@7918.84,4569.16 cw(c7969.15,4518.85) pad.0@7969.15,4590 ; pad.0@7918.84,4569.16 cw(c7969.15,4518.85) pad.0@7969.15,4590 ; pad.0@7918.84,4569.16 cw(c7969.15,4518.85) pad.0@7969.15,4590 ; pad.0@7920.16,4585.28 ccw(c7948.08,4605.3) pad.0@7942.49,4571.4 ; pad.0@7920.16,4585.28 ccw(c7948.08,4605.3) pad.0@7942.49,4571.4 ; pad.0@7920.16,4585.28 ccw(c7948.08,4605.3) pad.0@7942.49,4571.4 ; pad.0@7920.16,4585.28 ccw(c7948.08,4605.3) pad.0@7942.49,4571.4 ; pad.0@7921.92,4574.24 ccw(c7970.53,4558.9) pad.0@7925.31,4535.38 ; pad.0@7921.92,4574.24 ccw(c7970.53,4558.9) pad.0@7925.31,4535.38 ; pad.0@7921.92,4574.24 ccw(c7970.53,4558.9) pad.0@7925.31,4535.38 ; pad.0@7922.2,4575.26 ccw(c7942.29,4570.75) pad.0@7924.89,4559.73 ; pad.0@7922.2,4575.26 ccw(c7942.29,4570.75) pad.0@7924.89,4559.73 ; pad.0@7922.2,4575.26 ccw(c7942.29,4570.75) pad.0@7924.89,4559.73 ; pad.0@7922.21,4575.31 cw(c7935.51,4572.37) pad.0@7936.84,4585.93 ; pad.0@7922.21,4575.31 cw(c7935.51,4572.37) pad.0@7936.84,4585.93 ; pad.0@7922.21,4575.31 cw(c7935.51,4572.37) pad.0@7936.84,4585.93 ; pad.0@7922.21,4575.31 cw(c7935.51,4572.37) pad.0@7936.84,4585.93 ; pad.0@7926.34,4590 cw(c7926.34,4526.66) pad.0@7989.31,4533.52 ; pad.0@7926.34,4590 cw(c7926.34,4526.66) pad.0@7989.31,4533.52 ; pad.0@7926.34,4590 cw(c7926.34,4526.66) pad.0@7989.31,4533.52 ; pad.0@7926.34,4590 cw(c7926.34,4526.66) pad.0@7989.31,4533.52 ; pad.0@7929.08,4573.61 ccw(c7940.67,4599.2) pad.0@7956.4,4575.93 ; pad.0@7929.08,4573.61 ccw(c7940.67,4599.2) pad.0@7956.4,4575.93 ; pad.0@7929.08,4573.61 ccw(c7940.67,4599.2) pad.0@7956.4,4575.93 ; pad.0@7929.56,4567.31 ccw(c7983.28,4588.17) pad.0@7960.04,4535.44 ; pad.0@7929.56,4567.31 ccw(c7983.28,4588.17) pad.0@7960.04,4535.44 ; pad.0@7929.56,4567.31 ccw(c7983.28,4588.17) pad.0@7960.04,4535.44 ; pad.0@7932.06,4590 cw(c7932.06,4555.06) pad.0@7956.77,4579.77 ; pad.0@7932.06,4590 cw(c7932.06,4555.06) pad.0@7956.77,4579.77 ; pad.0@7932.06,4590 cw(c7932.06,4555.06) pad.0@7956.77,4579.77 ; pad.0@7943.85,4590 cw(c7943.85,4518.85) pad.0@7994.16,4569.16 ; pad.0@7943.85,4590 cw(c7943.85,4518.85) pad.0@7994.16,4569.16 ; pad.0@7943.85,4590 cw(c7943.85,4518.85) pad.0@7994.16,4569.16 ; pad.0@7945.47,4532.09 ccw(c7927.38,4547.43) pad.0@7949.49,4556.02 ; pad.0@7945.47,4532.09 ccw(c7927.38,4547.43) pad.0@7949.49,4556.02 ; pad.0@7945.47,4532.09 ccw(c7927.38,4547.43) pad.0@7949.49,4556.02 ; pad.0@7946.99,4558.69 cw(c7962.63,4565.57) pad.0@7953.69,4580.13 ; pad.0@7946.99,4558.69 cw(c7962.63,4565.57) pad.0@7953.69,4580.13 ; pad.0@7946.99,4558.69 cw(c7962.63,4565.57) pad.0@7953.69,4580.13 ; pad.0@7947.73,4534.17 ccw(c7939.86,4545.19) pad.0@7953.25,4547.25 ; pad.0@7947.73,4534.17 ccw(c7939.86,4545.19) pad.0@7953.25,4547.25 ; pad.0@7947.73,4534.17 ccw(c7939.86,4545.19) pad.0@7953.25,4547.25 ; pad.0@7947.73,4534.17 ccw(c7939.86,4545.19) pad.0@7953.25,4547.25 ; pad.0@7951.25,4566.08 cw(c7946.39,4550.66) pad.0@7960.72,4558.13 ; pad.0@7951.25,4566.08 cw(c7946.39,4550.66) pad.0@7960.72,4558.13 ; pad.0@7951.25,4566.08 cw(c7946.39,4550.66) pad.0@7960.72,4558.13 ; pad.0@7952.53,4565.75 cw(c7943.88,4522.89) pad.0@7980.3,4547.08 ; pad.0@7952.53,4565.75 cw(c7943.88,4522.89) pad.0@7980.3,4547.08 ; pad.0@7952.53,4565.75 cw(c7943.88,4522.89) pad.0@7980.3,4547.08 ; pad.0@7953.21,4579.74 cw(c7977.49,4556.13) pad.0@7977.49,4590 ; pad.0@7953.21,4579.74 cw(c7977.49,4556.13) pad.0@7977.49,4590 ; pad.0@7953.21,4579.74 cw(c7977.49,4556.13) pad.0@7977.49,4590 ; pad.0@7953.25,4547.25 ccw(c7971.13,4550) pad.0@7961.59,4534.62 ; pad.0@7953.25,4547.25 ccw(c7971.13,4550) pad.0@7961.59,4534.62 ; pad.0@7953.25,4547.25 ccw(c7971.13,4550) pad.0@7961.59,4534.62 ; pad.0@7953.25,4547.25 ccw(c7971.13,4550) pad.0@7961.59,4534.62 ; pad.0@7953.91,4542.95 cw(c7971.7,4550.78) pad.0@7961.54,4567.34 ; pad.0@7953.91,4542.95 cw(c7971.7,4550.78) pad.0@7961.54,4567.34 ; pad.0@7953.91,4542.95 cw(c7971.7,4550.78) pad.0@7961.54,4567.34 ; pad.0@7963.96,4569.29 cw(c8013,4521.6) pad.0@8013,4590 ; pad.0@7963.96,4569.29 cw(c8013,4521.6) pad.0@8013,4590 ; pad.0@7963.96,4569.29 cw(c8013,4521.6) pad.0@8013,4590 ; pad.0@7966.92,4574.25 ccw(c8009.08,4560.98) pad.0@7969.89,4540.55 ; pad.0@7966.92,4574.25 ccw(c8009.08,4560.98) pad.0@7969.89,4540.55 ; pad.0@7966.92,4574.25 ccw(c8009.08,4560.98) pad.0@7969.89,4540.55 ; pad.0@7967.25,4575.53 ccw(c7983.56,4572.24) pad.0@7969.7,4563.03 ; pad.0@7967.25,4575.53 ccw(c7983.56,4572.24) pad.0@7969.7,4563.03 ; pad.0@7967.25,4575.53 ccw(c7983.56,4572.24) pad.0@7969.7,4563.03 ; pad.0@7975.25,4569.73 ccw(c8033.04,4592.16) pad.0@8008.04,4535.44 ; pad.0@7975.25,4569.73 ccw(c8033.04,4592.16) pad.0@8008.04,4535.44 ; pad.0@7975.25,4569.73 ccw(c8033.04,4592.16) pad.0@8008.04,4535.44 ; pad.0@7980.06,4590 cw(c7980.06,4555.06) pad.0@8004.77,4579.77 ; pad.0@7980.06,4590 cw(c7980.06,4555.06) pad.0@8004.77,4579.77 ; pad.0@7980.06,4590 cw(c7980.06,4555.06) pad.0@8004.77,4579.77 ; 7858.09,5160 cw(c7858.09,5099.09) 7901.16,5142.16 ccw(c7858.09,5099.09) 7858.09,5160 ; pad.0@7903.09,5160 cw(c7903.09,5099.09) 7946.16,5142.16 ccw(c7903.09,5099.09) pad.0@7903.09,5160 ; pad.0@7918.84,5142.16 cw(c7961.91,5099.09) 7961.91,5160 ccw(c7961.91,5099.09) pad.0@7918.84,5142.16 ; pad.0@7951.09,5160 cw(c7951.09,5099.09) 7994.16,5142.16 ccw(c7951.09,5099.09) pad.0@7951.09,5160 ; pad.0@7963.84,5142.16 cw(c8006.91,5099.09) 8006.91,5160 ccw(c8006.91,5099.09) pad.0@7963.84,5142.16
  Top Layer w15.75: v5(5347,4513) 5347.84,4513.84 U9.1@5411.2,4513.84 ; U9.10@5411.2,4744.16 5467.84,4744.16 v5(5468,4744) ; v5@5352.57,4507.43 cw(c5368.04,4491.96) 5368.04,4513.84 ; v5@5352.57,4507.43 cw(c5368.04,4491.96) 5368.04,4513.84 ; v5@5352.57,4507.43 cw(c5368.04,4491.96) 5368.04,4513.84 ; v5@5352.57,4518.57 ccw(c5363.98,4529.98) 5363.98,4513.84 ; v5@5352.57,4518.57 ccw(c5363.98,4529.98) 5363.98,4513.84 ; v5@5352.57,4518.57 ccw(c5363.98,4529.98) 5363.98,4513.84 ; 5448.61,4744.16 cw(c5448.61,4724.61) v5@5462.43,4738.43 ; 5448.61,4744.16 cw(c5448.61,4724.61) v5@5462.43,4738.43 ; 5448.61,4744.16 cw(c5448.61,4724.61) v5@5462.43,4738.43 ; 5449.37,4744.16 ccw(c5449.37,4762.63) v5@5462.43,4749.57 ; 5449.37,4744.16 ccw(c5449.37,4762.63) v5@5462.43,4749.57 ; 5449.37,4744.16 ccw(c5449.37,4762.63) v5@5462.43,4749.57
  Top Layer w19.68: D19.4@6463.92,2833 D19.4@6464.4,2833.48 6534.48,2833.48 v13(6535,2834) ; pad.0@7610.04,2256.96 ccw(c7594.93,2272.07) 7616.3,2272.07 ; 7616.3,2275.45 ccw(c7642.45,2275.45) pad.0@7623.96,2256.96 ; C201.1@7616.3,2413.98 7616.3,2227.7 7642,2202 7742.88,2202 C69.2@7745,2199.88 ; pad.0@7625.7,2245.4 ccw(c7649.7,2232.7) 7630.5,2213.5 ; R90.2@7663,2650 7794,2650 R93.2@7800,2656 ; R90.2@7669.77,2644.23 cw(c7683.69,2630.31) 7683.69,2650 cw(c7683.69,2669.69) R90.2@7669.77,2655.77 ; pad.0@7676.04,2195.04 ccw(c7659.24,2178.24) 7659.24,2202 ccw(c7659.24,2225.76) pad.0@7676.04,2208.96 ; pad.0@7683.67,2202 cw(c7683.67,2142.49) C69.2@7725.75,2184.57 ; pad.0@7689.96,2195.04 cw(c7706.76,2178.24) 7706.76,2202 cw(c7706.76,2225.76) pad.0@7689.96,2208.96 ; pad.0@7693.9,2202 ccw(c7693.9,2247.04) C69.2@7725.75,2215.19 ; 7710.82,2650 ccw(c7710.82,2677.18) pad.0@7730.04,2657.96 ; 7715.65,2650 cw(c7715.65,2629.65) pad.0@7730.04,2644.04 ; pad.0@7743.96,2644.04 cw(c7758.35,2629.65) 7758.35,2650 ; pad.0@7743.96,2657.96 ccw(c7763.18,2677.18) 7763.18,2650 ; 7764.82,2650 ccw(c7764.82,2690.18) R93.2@7793.23,2661.77 ; v3(8420,4775) 8420,4743 8438,4725 D16.2@8477,4725 ; D16.2@8464.82,4717.82 ccw(c8447.48,4700.48) 8447.48,4725 ccw(c8447.48,4749.52) D16.2@8464.82,4732.18
  Top Layer w20: C221.2@4649,3611.87 4654.54,3617.4 U37.1@4724.85,3617.4 ; C221.2@4657.22,3608.33 cw(c4679.12,3586.43) 4679.12,3617.4 ; v1(4689,3617.4) 4689,3591 4700,3580 U37.2@4724.85,3580 ; 4697,3583 ccw(c4707.75,3593.76) U37.2@4715.57,3580.71 ; C222.2@4915,3654.87 4993.87,3654.87 5023,3684 ; C220.2@5012.74,3702.38 cw(c5001.4,3684) 5023,3684 ; C220.2@5016.15,3712.15 cw(c4999.62,3695.62) 5023,3695.62 cw(c5046.38,3695.62) C220.2@5029.85,3712.15 ; C220.2@5023,3719 5023,3684 ; C220.2@5033.26,3702.38 ccw(c5044.6,3684) 5023,3684 ; v2@5314,4311 v2(5305,4320) U8.10@5386.92,4320 5439,4320 5448,4311 C41.1@5528,4311 C41.1@5519,4320 ; v2@5315.61,4309.39 cw(c5341.21,4283.79) 5341.21,4320 cw(c5341.21,4356.21) v2@5315.61,4330.61 ; U8.10@5422.35,4318.19 cw(c5422.35,4273.63) 5453.86,4305.14 ; U8.10@5422.82,4318.25 cw(c5429.38,4293.73) 5447.32,4311.68 ; C41.1@5522.34,4305.34 ccw(c5508.69,4291.69) 5508.69,4311 ccw(c5508.69,4330.31) C41.1@5522.34,4316.66 ; v3(5577,3482) U14.10@5577,3565.76 ; U18.4@5875,4452 U18.3@5875,4502 U18.2@5875,4552 U18.1@5875,4602 ; v1@6174.24,4165.66 6174.24,4127.76 6188.25,4113.75 D18.2@6211.9,4113.75 ; 6182.53,4119.47 ccw(c6199.1,4136.04) D18.2@6199.1,4112.61 ; R65.2@6453,4369 6489,4369 6502,4382 v3(6502,4442) ; v3(6508,4822) 6551.6,4822 ; 6550.17,4823.43 cw(c6522.11,4795.38) D12.1@6561.79,4795.38 ; D12.1@6561.79,4795.47 ccw(c6526.88,4797.28) 6551.6,4822 ; D12.1@6563.6,4783.57 6563.6,4810 6551.6,4822 ; C49.2@6902,4573 v3(6902,4644) ; R95.1@7972,4053 8057,4053 v6(8106,4102) ; R104.1@8354,2657 v1(8418,2657) ; R104.1@8360.66,2651.34 cw(c8374.31,2637.69) 8374.31,2657 cw(c8374.31,2676.31) R104.1@8360.66,2662.66 ; v3(8649,2813) U30.7@8649,2873 ; U29.7@8649,4230 v3(8726,4230) ; U32.4@8920.6,2560.52 8975.52,2560.52 v3(9006,2591) ; U31.4@8920.6,3868.52 8978.52,3868.52 v3(9009,3899) ; C93.2@9117,2253 9217,2253 v1(9254,2216) ; C93.2@9123.66,2247.34 cw(c9137.31,2233.69) 9137.31,2253 cw(c9137.31,2272.31) C93.2@9123.66,2258.66 ; 6472.31,4369 ccw(c6472.31,4349.69) 6458.66,4363.34 cw(c6472.31,4349.69) 6472.31,4369 ; 6472.31,4369 cw(c6472.31,4388.31) 6458.66,4374.66 ccw(c6472.31,4388.31) 6472.31,4369 ; 6902,4592.31 ccw(c6921.31,4592.31) 6907.66,4578.66 cw(c6921.31,4592.31) 6902,4592.31 ; 6902,4592.31 cw(c6882.69,4592.31) 6896.34,4578.66 ccw(c6882.69,4592.31) 6902,4592.31 ; 7992.31,4053 ccw(c7992.31,4033.69) 7978.66,4047.34 cw(c7992.31,4033.69) 7992.31,4053 ; 7992.31,4053 cw(c7992.31,4072.31) 7978.66,4058.66 ccw(c7992.31,4072.31) 7992.31,4053 ; 8088.93,4084.93 cw(c8106,4067.86) v6@8106,4092 ; 8088.93,4084.93 ccw(c8071.86,4102) v6@8096,4102 ; 8088.93,4084.93 cw(c8106,4067.86) v6@8106,4092 ; 8088.93,4084.93 ccw(c8071.86,4102) v6@8096,4102 ; 8088.93,4084.93 ccw(c8071.86,4102) v6@8096,4102 ; 8088.93,4084.93 cw(c8106,4067.86) v6@8106,4092 ; U32.4@8958,2562.33 ccw(c8958,2609) 8991,2576 cw(c8958,2609) U32.4@8958,2562.33 ; U31.4@8958,3870.33 ccw(c8958,3924.24) 8996.12,3886.12 cw(c8958,3924.24) U31.4@8958,3870.33
  Top Layer w23.62: v4(5280,4160) 5320,4120 U8.6@5386.92,4120 ; 5305,3434 cw(c5327.49,3411.52) U11.8@5331.99,3443 ; U11.8@5363.49,3443 5314,3443 5291,3420 5291,3372 5320,3343 U11.6@5363.49,3343 5711,3343 v4(5735,3319) ; U31.8@8684.38,3720.88 8778.88,3720.88 v5(8794,3736) ; U11.8@5331.99,3443 ccw(c5331.99,3399.56) 5301.28,3430.28 cw(c5331.99,3399.56) U11.8@5331.99,3443 ; 5311.52,3351.48 ccw(c5331.99,3371.95) 5331.99,3343 cw(c5331.99,3371.95) 5311.52,3351.48 ; 8748,3720.88 ccw(c8748,3782) 8791.22,3738.78 cw(c8748,3782) 8748,3720.88
  Top Layer w30: U5.6@4920.49,3343 v3(4984,3343) ; U5.8@4920.49,3443 v3(4984,3443) ; C18.1@4950,2992 5017,2992 v8(5046,3021) C23.2@5046,3215 ; C28.1@5397,2992 5448,2941 v3(5448,2940) ; v3(5795,4601) 5796,4602 U18.1@5875,4602 ; v4(5798,3350) 5829,3381 D8.2@5884,3381 D9.2@5884,3261 ; R61.1@6347,3581.5 v3(6347,3635) R69.1@6347,3687 ; R80.2@6768,4365 6866,4365 6905.8,4325.2 v10(7066,4325.2) ; C56.2@7020,4762 6957,4762 v3(6951,4768) ; v3(7178,4438) C59.1@7250,4438 ; C58.2@7236,5396 v3(7299,5396) C65.1@7368,5396 ; v3(7764,4237) 7800,4273 D13.2@7882,4273 ; C215.2@7788,3582 7788,3569 7812,3545 v7(7879,3545) ; C215.2@7791,3581 ccw(c7827.21,3581) 7801.61,3555.39 ; pad.0@7956.45,4528.79 ccw(c7965.21,4557.7) pad.0@7979.46,4531.06 ; pad.0@7958.5,5122.94 ccw(c7962.35,5174.38) pad.0@8008.91,5152.18 ; pad.0@7959.49,5093.31 ccw(c7938.44,5175.29) pad.0@8020.29,5153.76 ; pad.0@7970.38,4525.68 cw(c7981.35,4503.17) pad.0@7999.4,4520.53 ; pad.0@7976.82,5105.69 cw(c8026.11,5112.39) pad.0@8003.17,5156.53 ; pad.0@7985.01,4566.64 cw(c8001.57,4548.41) pad.0@8002.76,4573.01 ; C75.2@7986,4698 v3(8047,4698) ; C74.2@7986,5262 8050,5262 v3(8051,5261) ; pad.0@7991.78,4558.81 ccw(c7972.21,4575.73) pad.0@7998.01,4577.63 ; pad.0@7999.51,4574.42 cw(c7985.14,4559.69) pad.0@8002.96,4549.4 ; pad.0@8001.36,4582.72 ccw(c7991.99,4609.7) 8017.69,4597.25 ; pad.0@8001.92,5155.88 ccw(c7991.23,5204.24) 8032.99,5177.61 ; pad.0@8007.76,4576.47 cw(c8034.96,4567.76) pad.0@8021.89,4593.15 ; pad.0@8007.87,4525.13 cw(c8068.82,4539.26) pad.0@8016.4,4573.41 ; pad.0@8007.92,5150.09 cw(c8056.03,5141.17) 8028.31,5181.5 ; pad.0@8008,5160 8046,5198 ; pad.0@8013,4590 8049,4626 C80.2@8224,4626 ; X1.2@8063,3837 8065,3835 8128,3835 8157,3806 v7(8157,3738) ; X1.2@8080.61,3826.39 cw(c8101.38,3805.62) 8101.38,3835 ; X1.2@8080.61,3847.61 ccw(c8111.04,3878.04) 8111.04,3835 ; v3(8191,5274) 8224,5241 C78.2@8224,5198 8046,5198 ; C83.2@8389,5498 v3(8389,5576) ; v3(8432,2354) C85.2@8504,2354 ; C92.2@8834,2662 pad.2@8900,2662 ; C86.2@8834,3961 pad.0@8903,3961 ; v3(6951,4768) ccw(c6965.49,4782.49) 6965.49,4762 ; v3(6951,4768) ccw(c6965.49,4782.49) 6965.49,4762 ; v3(6951,4768) ccw(c6965.49,4782.49) 6965.49,4762 ; 6953.88,4325.2 ccw(c6953.88,4407.8) 7012.28,4349.4 cw(c6953.88,4407.8) 6953.88,4325.2 ; 6953.88,4325.2 cw(c6953.88,4242.61) 7012.28,4301.01 ccw(c6953.88,4242.61) 6953.88,4325.2 ; C57.2@7029.79,4325.2 cw(c7029.79,4288.99) C57.2@7055.39,4314.6 ; C57.2@7029.79,4325.2 ccw(c7029.79,4361.42) C57.2@7055.39,4335.81 ; C57.2@7029.79,4325.2 cw(c7029.79,4288.99) C57.2@7055.39,4314.6 ; C57.2@7029.79,4325.2 ccw(c7029.79,4361.42) C57.2@7055.39,4335.81 ; C57.2@7029.79,4325.2 ccw(c7029.79,4361.42) C57.2@7055.39,4335.81 ; C57.2@7029.79,4325.2 cw(c7029.79,4288.99) C57.2@7055.39,4314.6 ; pad.0@7957,4580 ccw(c7957,4691.05) 8035.53,4612.53 ; pad.0@7957,4580 ccw(c7957,4691.05) 8035.53,4612.53 ; pad.0@7957,4580 ccw(c7957,4691.05) 8035.53,4612.53 ; pad.0@7957,4580 ccw(c7957,4691.05) 8035.53,4612.53 ; pad.0@7957,5153 ccw(c7957,5259.23) 8032.11,5184.11 ; pad.0@7957,5153 ccw(c7957,5259.23) 8032.11,5184.11 ; pad.0@7957,5153 ccw(c7957,5259.23) 8032.11,5184.11 ; pad.0@7958.79,4549.92 ccw(c7963.26,4599.83) pad.0@8008.36,4577.99 ; pad.0@7958.79,4549.92 ccw(c7963.26,4599.83) pad.0@8008.36,4577.99 ; pad.0@7958.79,4549.92 ccw(c7963.26,4599.83) pad.0@8008.36,4577.99 ; pad.0@7958.79,4549.92 ccw(c7963.26,4599.83) pad.0@8008.36,4577.99 ; pad.0@7959.27,4520.26 ccw(c7940.51,4600.59) pad.0@8020.19,4579.24 ; pad.0@7959.27,4520.26 ccw(c7940.51,4600.59) pad.0@8020.19,4579.24 ; pad.0@7959.27,4520.26 ccw(c7940.51,4600.59) pad.0@8020.19,4579.24 ; pad.0@7976.85,4532.43 cw(c8027.55,4538.62) pad.0@8004.18,4584.04 ; pad.0@7976.85,4532.43 cw(c8027.55,4538.62) pad.0@8004.18,4584.04 ; pad.0@7976.85,4532.43 cw(c8027.55,4538.62) pad.0@8004.18,4584.04 ; pad.0@7976.85,4532.43 cw(c8027.55,4538.62) pad.0@8004.18,4584.04 ; pad.0@8001.94,4582.89 ccw(c7991.03,4633.23) 8034.35,4605.35 ; pad.0@8001.94,4582.89 ccw(c7991.03,4633.23) 8034.35,4605.35 ; pad.0@8001.94,4582.89 ccw(c7991.03,4633.23) 8034.35,4605.35 ; pad.0@8007,4530 cw(c8137.37,4530) 8045.18,4622.18 ; pad.0@8007,4530 cw(c8137.37,4530) 8045.18,4622.18 ; pad.0@8007,4530 cw(c8137.37,4530) 8045.18,4622.18 ; pad.0@8007,4530 cw(c8137.37,4530) 8045.18,4622.18 ; pad.0@8007,5103.23 cw(c8140.14,5103.85) 8046,5198 ; pad.0@8007,5103.23 cw(c8140.14,5103.85) 8046,5198 ; pad.0@8007,5103.23 cw(c8140.14,5103.85) 8046,5198 ; pad.0@8007.91,4577.06 cw(c8054.34,4568.16) 8027.8,4607.28 ; pad.0@8007.91,4577.06 cw(c8054.34,4568.16) 8027.8,4607.28 ; pad.0@8007.91,4577.06 cw(c8054.34,4568.16) 8027.8,4607.28 ; v3(8169,5325) cw(c8207.63,5286.37) 8207.63,5341 ccw(c8207.63,5286.37) v3(8169,5325) ; v3(8169,5325) 8185,5341 C82.2@8243,5341 C77.2@8243,5438.88 8321.12,5438.88 v3(8333,5427) ; 8243,5399.06 ccw(c8203.18,5399.06) 8231.34,5427.22 cw(c8203.18,5399.06) 8243,5399.06 ; 8243,5399.06 cw(c8282.82,5399.06) 8254.66,5427.22 ccw(c8282.82,5399.06) 8243,5399.06 ; 8304.48,5438.88 ccw(c8304.48,5399.06) 8276.32,5427.22 cw(c8304.48,5399.06) 8304.48,5438.88 ; 8304.48,5438.88 cw(c8304.48,5478.71) 8276.32,5450.55 ccw(c8304.48,5478.71) 8304.48,5438.88 ; v3(8333,5427) ccw(c8304.31,5398.31) 8304.31,5438.88 cw(c8304.31,5398.31) v3(8333,5427)
  Top Layer w31.5: C20.2@5011,3815 v5(5071,3815) ; 5058.82,3929.18 ccw(c5090.52,3960.87) U8.19@5091.75,3916.06 ; U8.19@5097.7,3920 cw(c5097.7,3991.7) v5(5047,3941) 5068,3920 U8.19@5127.08,3920 ; v5(5107,4469) 5158,4469 5202,4425 C22.2@5203,4425 ; C35.2@5687,3393 v4(5752,3393) ; SW2.1@5748,4095 v5(5806,4095) ; C43.2@6079,4757 v4(6079,4818) ; D14.2@8101,3192 D15.2@8101,3097 v5(8160,3038) ; C87.2@8684,3297 C90.1@8684,3394 v4(8684,3454) ; U32.8@8684.38,2412.88 v5(8779.88,2412.88) ; v5(8739,3477) C89.2@8739,3537 ; C96.2@9113,4049 C97.1@9113,4137 v4(9183,4137) ; v4(9114,3452) 9114,3448 9115,3449 C99.2@9115,3515 ; 5781.27,4095 ccw(c5781.27,4061.73) 5757.74,4085.26 cw(c5781.27,4061.73) 5781.27,4095 ; 5781.27,4095 cw(c5781.27,4128.27) 5757.74,4104.74 ccw(c5781.27,4128.27) 5781.27,4095
  Top Layer w39.37: SW1.2@5603,4677 v18(5603,4742) ; C46.2@6359,4542 6412,4489 v8(6431,4489) ; v10(7066,4325.2) 7186.8,4325.2 v8(7187,4325) ; 6391.84,4509.16 ccw(c6431,4548.31) v8@6431,4492.94 ; 6391.84,4509.16 ccw(c6431,4548.31) v8@6431,4492.94 ; 6391.84,4509.16 ccw(c6431,4548.31) v8@6431,4492.94 ; v8@7166.81,4325.2 ccw(c7166.81,4253.92) 7116.41,4304.33 cw(c7166.81,4253.92) v8@7166.81,4325.2 ; v8@7166.81,4325.2 cw(c7166.81,4396.49) 7116.41,4346.08 ccw(c7166.81,4396.49) v8@7166.81,4325.2
  Top Layer w47.24: J3.4@6599,5531 6626,5558 R77.2@6736.88,5558 ; J3.4@6603.18,5526.82 cw(c6678.44,5451.56) 6678.44,5558 ; v8(6604,5424) 6651,5471 R78.1@6736.88,5471 ; J3.4@6605.18,5527.82 cw(c6678.03,5454.97) 6678.03,5558
  Top Layer w50: U26.12@8085.84,4385.28 U26.11@8085.84,4359.68 8085.84,4343.16 8107,4322 C81.2@8232,4322 8232,4238 v9(8231,4237) ; U25.12@8085.84,4955.28 U25.11@8085.84,4929.68 8085.84,4909.16 8103,4892 ; U26.11@8090.37,4359.68 ccw(c8141.2,4359.68) 8105.26,4323.74 ; U25.11@8090.83,4933.83 ccw(c8135,4924) 8103,4892 ; v2(8329,4892) C79.2@8232,4892 8103,4892 ; v2(8337,5118) C84.2@8448,5118 ; v8(8448,5048) C84.2@8448,5118 ; v8(8547,5118) C84.2@8448,5118 ; D6.1@8595,4743.48 cw(c8595,4689.16) 8633.41,4727.57 ; D6.1@8595,4765.98 8657.78,4703.2 v2(8752.2,4703.2) ; v8(8752,4985) 8752.2,4984.8 C88.2@8752.2,4864 ; v8(8851.41,4864) C88.2@8752.2,4864 ; v8(8868,4765) C91.2@8868,4677 8778.41,4677 v2(8752.2,4703.2) ; C105.2@9657,5048 9680.8,5024.2 v2(9680.8,4864) ; v2(8752.2,4703.2) ccw(c8815.47,4766.47) 8815.47,4677 ; v2(8752.2,4703.2) ccw(c8815.47,4766.47) 8815.47,4677 ; v2(8752.2,4703.2) ccw(c8815.47,4766.47) 8815.47,4677 ; v2(8752.2,4703.2) C88.2@8752.2,4864 ; 8752.2,4776.02 ccw(c8693.75,4776.02) 8735.08,4817.35 cw(c8693.75,4776.02) 8752.2,4776.02 ; 8752.2,4776.02 cw(c8810.66,4776.02) 8769.33,4817.35 ccw(c8810.66,4776.02) 8752.2,4776.02 ; 8752.2,4951.98 ccw(c8810.66,4951.98) 8769.33,4910.65 cw(c8810.66,4951.98) 8752.2,4951.98 ; 8752.2,4951.98 cw(c8693.75,4951.98) 8735.08,4910.65 ccw(c8693.75,4951.98) 8752.2,4951.98 ; 8810.66,4864 ccw(c8810.66,4805.55) 8769.33,4846.88 cw(c8810.66,4805.55) 8810.66,4864 ; 8810.66,4864 cw(c8810.66,4922.45) 8769.33,4881.12 ccw(c8810.66,4922.45) 8810.66,4864 ; 9680.8,4951.98 ccw(c9739.25,4951.98) 9697.92,4910.65 cw(c9739.25,4951.98) 9680.8,4951.98 ; 9680.8,4951.98 cw(c9622.34,4951.98) 9663.67,4910.65 ccw(c9622.34,4951.98) 9680.8,4951.98 ; C105.2@9662,5048 cw(c9616.62,5002.62) 9680.8,5002.62 ccw(c9616.62,5002.62) C105.2@9662,5048
  Top Layer w60: C54.2@7066,4920.2 v10(7066,5014)
  Mid-Layer 2 w20: J4.2@4995.9,5491.09 cw(c4995.9,5420.19) 5046.04,5470.33 ; J4.2@4995.9,5520.46 5105.36,5411 6281,5411 v2(6301,5431) ; J4.2@5015.9,5511.09 ccw(c5041.56,5511.09) 5023.41,5492.95 ; 6216.5,5411 ccw(c6216.5,5515.5) v2@6290.39,5441.61 ; 6264.79,5411 ccw(c6264.79,5467.21) v2@6304.54,5427.46